# EAGLE board esquema (EAGLE 6.4)
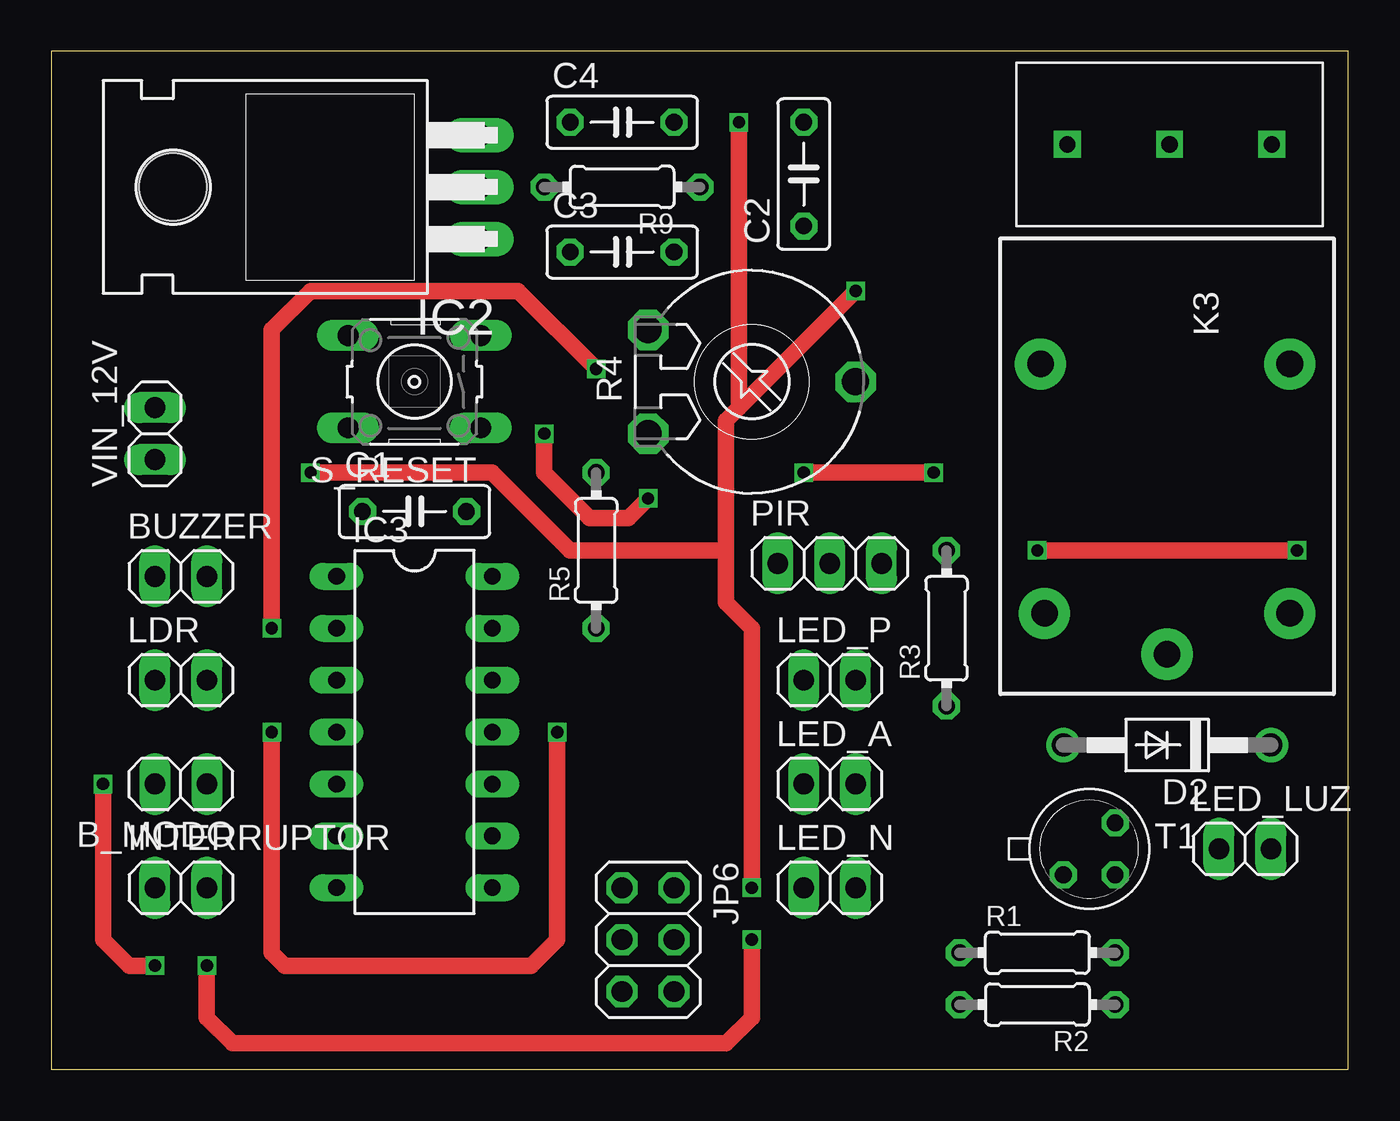
[diagram p0: board, top side]
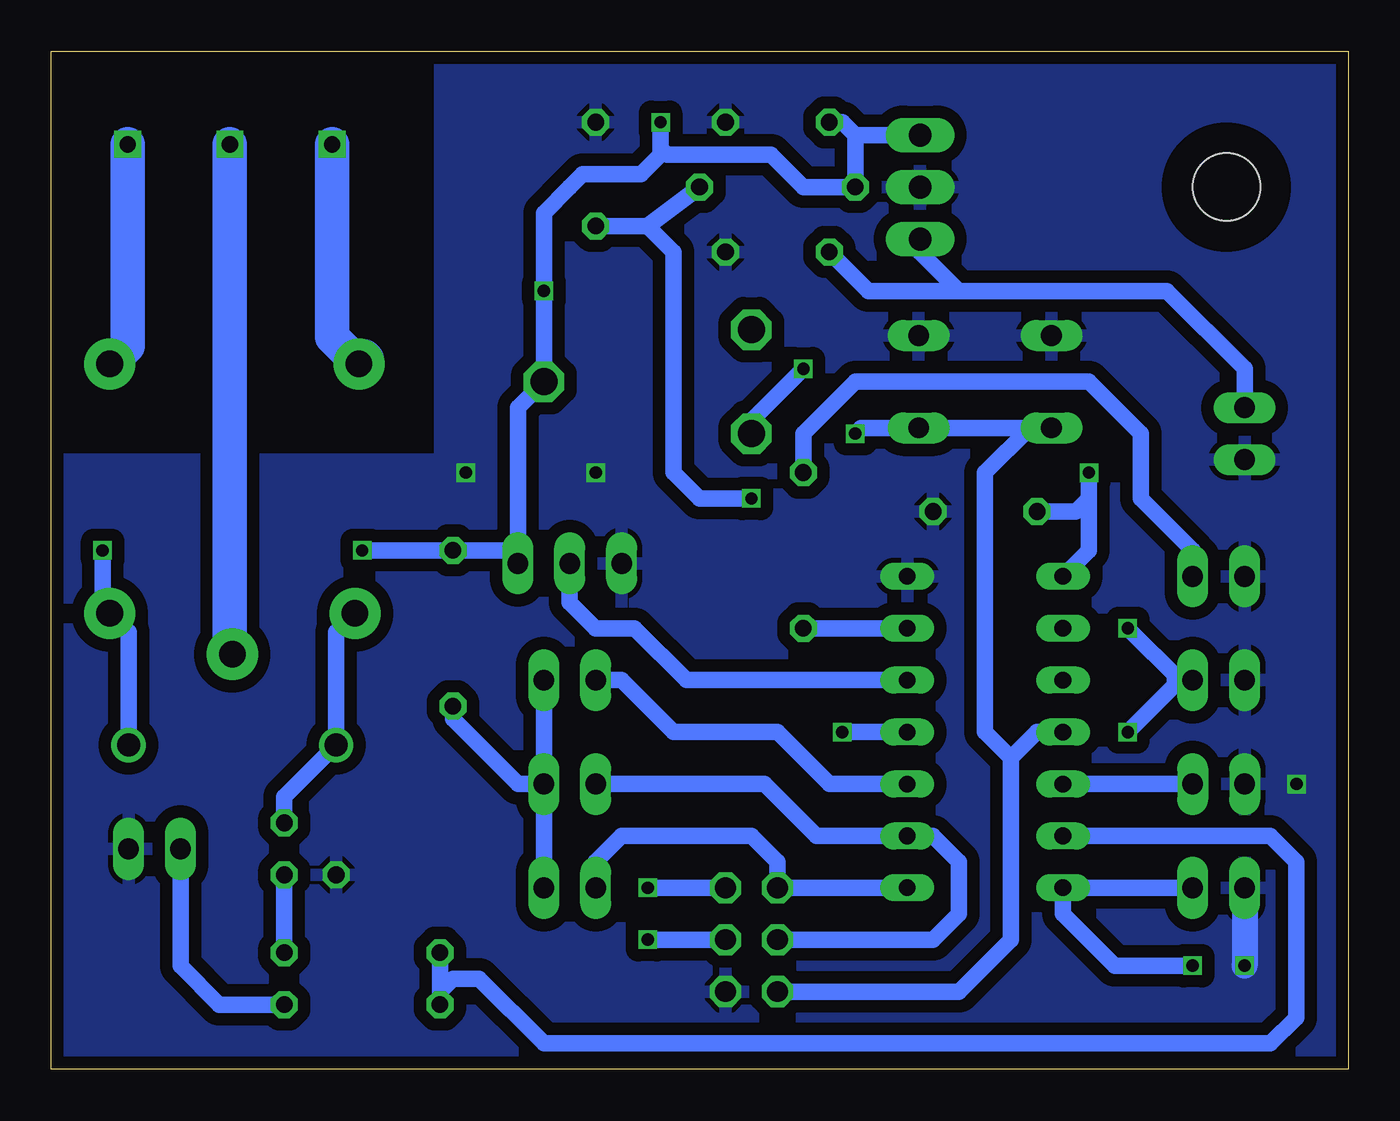
[diagram p1: board, bottom side, seen from below]

Size 63.48 x 49.84 mm. Coordinates in mm from the lower left corner, seen from the top.
Outline: 0,0 63.48,0 63.48,49.84 0,49.84 0,0
Copper layers (1*16): Top 0.035mm / dielectric 1.5mm / Bottom 0.035mm
Design rules "dirt_cheap_dirty_boards.v1": minimum track width 5mil, minimum drill 12mil, track to track 5mil, track to pad 5mil, pad to pad 5mil, via to via 5mil, smd to smd 0mil, copper to edge 10mil, drill to drill 10mil, minimum pad ring 10mil, minimum via ring 6mil, stop-mask expansion 2mil, vias tented up to drill 25mil, thermal gap 10mil

## Footprints (pad centres in the part's own frame; a part is rotated, then mirrored left to right if it is on the bottom)
1X02 = drill 1.016 long: 1 -1.27,0; 2 1.27,0
C050-025X075 = drill 0.813 octagon: 1 -2.54,0; 2 2.54,0
DO41-10 = drill 1.118: A 5.08,0; C -5.08,0
TO220H = drill 1.118 long: 1 -2.54,-10.16; 2 0,-10.16; 3 2.54,-10.16 | hole 3.302: 0,4.826
DIL14 = drill 0.813 long: 1 -7.62,-3.81; 2 -5.08,-3.81; 3 -2.54,-3.81; 4 0,-3.81; 5 2.54,-3.81; 6 5.08,-3.81; 7 7.62,-3.81; 8 7.62,3.81; 9 5.08,3.81; 10 2.54,3.81; 11 0,3.81; 12 -2.54,3.81; 13 -5.08,3.81; 14 -7.62,3.81
2X03 = drill 1.016 octagon: 1 -2.54,-1.27; 2 -2.54,1.27; 3 0,-1.27; 4 0,1.27; 5 2.54,-1.27; 6 2.54,1.27
ZN5 = drill 1.3 pad 2.5: 11 8.89,0; 12 -5.31,-6.2; 14 -5.31,6; A1 6.89,6; A2 6.89,-6
1X03 = drill 1.016 long: 1 -2.54,0; 2 0,0; 3 2.54,0
0204/7 = drill 0.813 octagon: 1 -3.81,0; 2 3.81,0
LI10 = drill 1.321 octagon: A -2.54,-5.08; E 2.54,-5.08; S 0,5.08
B3F-10XX = drill 1.016 long: 1 -3.251,2.261; 2 3.251,2.261; 3 -3.251,-2.261; 4 3.251,-2.261
TO18 = drill 0.813 octagon: 1 -1.27,-1.27; 2 1.27,-1.27; 3 1.27,1.27
POT_CONNECTOR = drill 0.8 square: 1 4,12.5; 2 4,7.5; 3 4,2.5

## Placement (x,y rotation side)
B_MODO  [1X02]  6.35,13.97 180 top
BUZZER  [1X02]  6.35,24.13 0 top
C1  100nF  [C050-025X075]  17.78,27.3 0 top
C2  22pF  [C050-025X075]  36.83,43.81 90 top
C3  330nF  [C050-025X075]  27.94,40.01 0 top
C4  100nF  [C050-025X075]  27.94,46.35 0 top
D2  1N4004  [DO41-10]  54.61,15.88 180 top
IC2  7805T  [TO220H]  10.79,43.18 90 top
IC3  TINY24/44/84-PU  [DIL14]  17.78,16.51 270 top
INTERRUPTOR  [1X02]  6.35,8.89 0 top
JP6  [2X03]  29.21,6.35 270 top
K3  ZNS5106  [ZN5]  54.61,29.21 270 top
LDR  [1X02]  6.35,19.05 0 top
LED_A  [1X02]  38.1,13.97 0 top
LED_LUZ  [1X02]  58.42,10.79 0 top
LED_N  [1X02]  38.1,8.89 0 top
LED_P  [1X02]  38.1,19.05 0 top
PIR  [1X03]  38.1,24.77 0 top
R1  680  [0204/7]  48.26,5.71 0 top
R2  470  [0204/7]  48.26,3.17 180 top
R3  470  [0204/7]  43.81,21.59 90 top
R4  [LI10]  34.29,33.66 270 top
R5  100  [0204/7]  26.67,25.4 90 top
R9  10k  [0204/7]  27.94,43.18 180 top
S_RESET  [B3F-10XX]  17.78,33.66 180 top
T1  2N2222  [TO18]  50.8,10.79 0 top
U$1  POT_CONNECTOR  [POT_CONNECTOR]  62.23,41.27 90 top
VIN_12V  [1X02]  5.08,31.11 90 top

## Library data of the parts
B_MODO BUZZER INTERRUPTOR JP6 LDR LED_A LED_LUZ LED_N LED_P PIR VIN_12V = pinhead
C1-C4 R1-R3 R5 R9 = rcl
D2 = diode
IC2 = linear
IC3 = avr-5
K3 = relay; OC_FARNELL: unknown; OC_NEWARK: unknown
R4 = pot
S_RESET = switch-omron; MPN: B3F-1000; OC_FARNELL: 176432; OC_NEWARK: 36M3542
T1 = transistor
U$1 = mi_lib

## Nets
GND: B_MODO.2 BUZZER.1 C1.2 C2.2 C3.2 C4.2 IC2.2 IC3.14 INTERRUPTOR.1 JP6.6 LDR.1 LED_LUZ.2 PIR.1 S_RESET.3 S_RESET.4 T1.1 VIN_12V.1
MISO: IC3.8 JP6.1 LED_N.1
N$1: B_MODO.1 IC3.5
N$2: IC3.7 INTERRUPTOR.2 JP6.4
N$3: IC3.11 LDR.2 R4.E
N$4: IC3.10 LED_P.1
N$6: IC3.12 PIR.2
N$7: BUZZER.2 R5.2
N$8: IC3.13 R5.1
N$9: C3.1 IC2.1 VIN_12V.2
N$10: LED_A.2 LED_N.2 LED_P.2 R3.1
N$21: K3.11 U$1.2
N$22: D2.A K3.A2 T1.3
N$23: R1.2 T1.2
N$24: IC3.6 R1.1 R2.2
N$25: K3.12 U$1.1
N$26: LED_LUZ.1 R2.1
N$33: K3.14 U$1.3
RESET: C2.1 IC3.4 JP6.5 R9.1 S_RESET.1 S_RESET.2
SCK: IC3.9 JP6.3 LED_A.1
VCC: C1.1 C4.1 D2.C IC2.3 IC3.1 JP6.2 K3.A1 PIR.3 R3.2 R4.S R9.2

## Tracks (layer width: path | path; a pad name or v marks a point on that pad's centre or on a via)
GND  (via drill 0.6)
  Top 0.813: v5.08,5.08 3.81,5.08 2.54,6.35 v2.54,13.97 | v36.83,29.21 v43.18,29.21
  Bottom 1.27: INTERRUPTOR.1 v5.08,5.08
  pour Bottom (isolate 0.61): 0,50.16 44.45,50.16 44.45,29.84 63.5,29.84 63.5,-0.64 0,-0.64
MISO
  Bottom 0.813: IC3.8 JP6.1 27.94,10.16 29.21,11.43 35.56,11.43 36.83,10.16 LED_N.1
N$1
  Bottom 0.813: B_MODO.1 IC3.5
N$2  (via drill 0.6)
  Top 0.813: v7.62,5.08 7.62,2.54 8.89,1.27 33.02,1.27 34.29,2.54 v34.29,6.35
  Bottom 0.813: INTERRUPTOR.2 IC3.7 13.97,7.62 11.43,5.08 v7.62,5.08 | v34.29,6.35 JP6.4
N$3  (via drill 0.6)
  Top 0.813: v10.79,16.51 10.79,5.71 11.43,5.08 23.5,5.08 24.77,6.35 v24.77,16.51 | v26.67,34.29 22.86,38.1 12.7,38.1 10.79,36.2 v10.79,21.59
  Bottom 0.813: v10.79,16.51 8.26,19.05 v10.79,21.59 | v24.77,16.51 IC3.11 | R4.E 29.21,31.75 v26.67,34.29
  Bottom 1.27: LDR.2 8.26,19.05
N$4
  Bottom 0.813: IC3.10 25.4,13.97 27.94,16.51 33.02,16.51 35.56,19.05 LED_P.1
N$6
  Bottom 0.813: IC3.12 32.38,19.05 34.92,21.59 36.83,21.59 38.1,22.86 PIR.2
N$7
  Bottom 0.813: BUZZER.2 7.62,25.4 10.16,27.94 10.16,31.11 12.7,33.66 24.13,33.66 26.67,31.11 R5.2
N$8
  Bottom 0.813: IC3.13 R5.1
N$9
  Bottom 0.813: VIN_12V.2 5.08,34.29 8.89,38.1 19.05,38.1 | 19.05,38.1 23.5,38.1 C3.1 | IC2.1 20.95,40.01 19.05,38.1
N$10
  Bottom 0.813: LED_N.2 LED_A.2 | LED_P.2 LED_A.2 | R3.1 43.81,17.14 40.64,13.97 LED_A.2
N$21
  Bottom 1.676: U$1.2 54.73,20.44
  Bottom 2.184: 54.73,20.44 K3.11
N$22
  Bottom 0.813: T1.3 52.07,13.34 D2.A 49.53,21.4 K3.A2
N$23
  Bottom 0.813: R1.2 T1.2
N$24
  Bottom 0.813: IC3.6 3.81,11.43 2.54,10.16 2.54,2.54 3.81,1.27 39.37,1.27 42.55,4.45 43.81,4.45 44.45,3.81 | 44.45,3.81 R2.2 | R1.1 44.45,3.81
N$25
  Bottom 1.676: U$1.1 49.73,35.84 K3.12
  Bottom 2.184: 48.26,34.67 K3.12
N$26
  Bottom 0.813: R2.1 55.24,3.17 57.15,5.08 LED_LUZ.1
N$33
  Bottom 1.676: 60.33,34.8 K3.14 59.73,35.4 U$1.3
RESET  (via drill 0.6)
  Top 0.813: v29.21,27.94 28.26,26.99 26.35,26.99 24.13,29.21 v24.13,31.11
  Bottom 0.813: JP6.5 19.05,3.81 16.51,6.35 16.51,15.24 | 16.51,15.24 15.24,16.51 IC3.4 | S_RESET.2 15.6,31.39 | 15.6,31.39 17.78,29.21 17.78,16.51 16.51,15.24 | 15.6,31.39 S_RESET.1 23.85,31.39 v24.13,31.11 | C2.1 34.29,41.27 | 34.29,41.27 R9.1 | v29.21,27.94 31.75,27.94 33.02,29.21 33.02,40.01 34.29,41.27
SCK
  Bottom 0.813: JP6.3 20.32,6.35 19.05,7.62 19.05,10.16 20.32,11.43 IC3.9 26.04,11.43 28.57,13.97 LED_A.1
VCC  (via drill 0.6)
  Top 0.813: v34.29,8.89 34.29,21.59 33.02,22.86 33.02,25.4 | 33.02,25.4 33.02,31.75 33.66,32.38 | 33.66,32.38 v39.37,38.1 | v12.7,29.21 21.59,29.21 25.4,25.4 33.02,25.4 | v48.26,25.4 v60.96,25.4 | v33.66,46.35 33.66,32.38
  Bottom 0.813: 24.13,45.72 R9.2 26.67,43.18 28.26,44.77 33.34,44.77 33.66,45.09 | D2.C 59.69,21.4 K3.A1 60.96,22.67 v60.96,25.4 | JP6.2 v34.29,8.89 | v48.26,25.4 R3.2 41.27,25.4 PIR.3 40.64,32.38 R4.S v39.37,38.1 39.37,41.91 38.1,43.18 37.47,43.81 34.61,43.81 33.66,44.77 33.66,45.09 | 33.66,45.09 v33.66,46.35 | v12.7,29.21 12.7,27.94 | 12.7,27.94 12.7,25.4 IC3.1 | C1.1 13.34,27.3 12.7,27.94 | IC2.3 24.13,45.72 | C4.1 24.77,46.35 24.13,45.72